# Altium PCB switch.PcbDoc
Units mil, origin at the board's own origin, x right, y up, seen from the top; angles counter-clockwise.
Board outline 850 x 435 mil, 2 copper layers (Top Layer, Bottom Layer); 25 components, 13 nets, 43 pads, 4 vias.
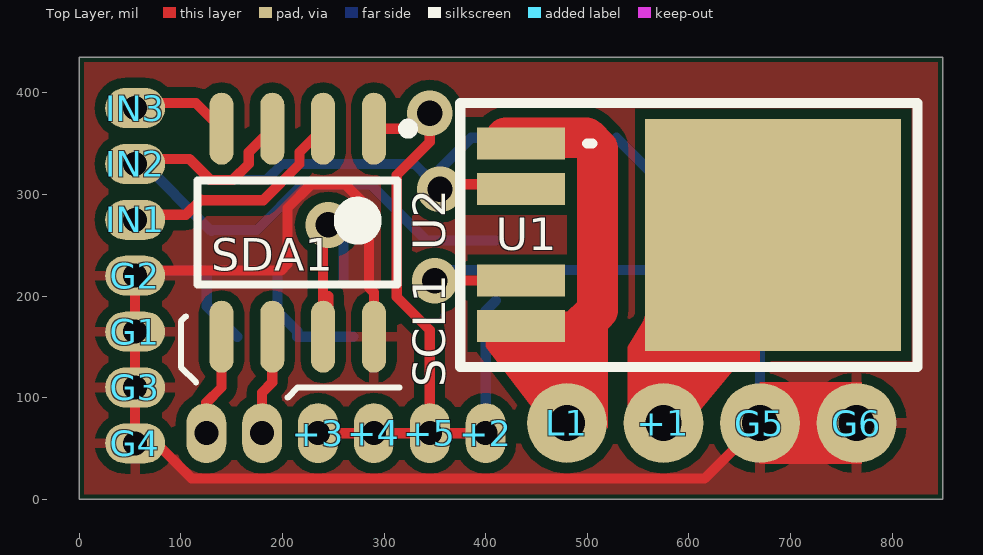
[diagram p0: Top Layer view]
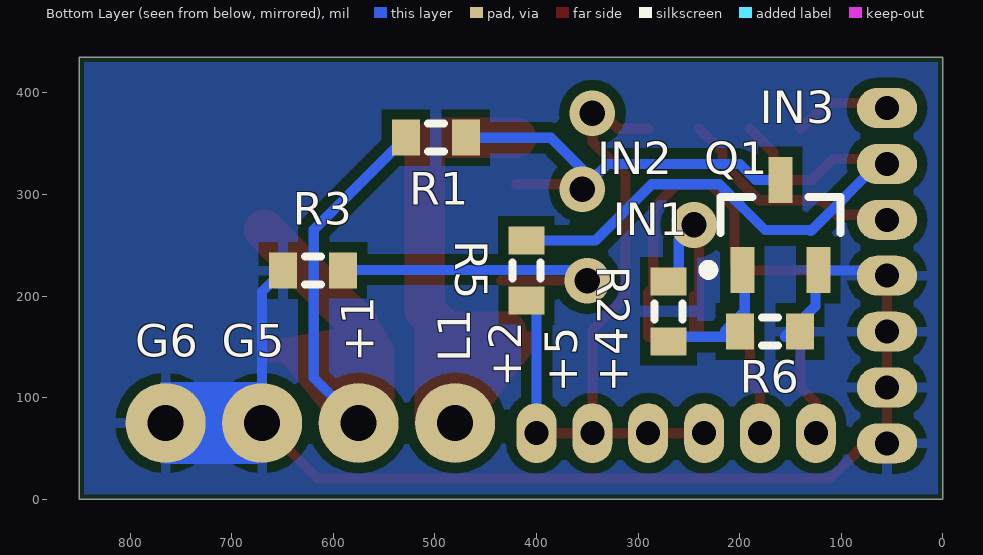
[diagram p1: Bottom Layer view, seen from below]

## Layer stack, top to bottom
Top Solder: solder mask 0.4, Solder Resist, Dk 3.5
Top Layer: signal copper 1.4
Dielectric1: dielectric 12.6, FR-4, Dk 4.8
Bottom Layer: signal copper 1.4
Bottom Solder: solder mask 0.4, Solder Resist, Dk 3.5

## Board outline
850,0 850,435 0,435 0,0

## Design rules (kind name [scope] priority, off if disabled: settings)
Clearance [All] p1: gap=10 ignorepadtopadclearanceinfootprint=FALSE except(0: Arc-Hole Track-Hole SMDPad-Hole THPad-Hole Via-Hole Fill-Hole Poly-Hole Region-Hole Text-Hole)
MinimumSolderMaskSliver [All] p1: minsoldermaskwidth=7
PolygonConnect [All] p1: connectstyle=Relief reliefconductorwidth=10 reliefentries=4 polygonreliefangle="90 Angle" airgapwidth=10
RoutingVias [All] p1: holewidth=28 width=50 viastyle="Through Hole" minholewidth=28 minwidth=50 maxholewidth=28 maxwidth=50
SilkToSilkClearance [All] p1: silktosilkclearance=5
SilkToSolderMaskClearance SilkToSolderMaskClearance_1 [HasFootprint('J1-0603')] p1: minsilkscreentomaskgap=0 clearancetoexposedcopper=TRUE
SilkToSolderMaskClearance [IsPad] p2: minsilkscreentomaskgap=7 clearancetoexposedcopper=TRUE
SolderMaskExpansion [All] p1: expansion=4
Width Width_1 [InNetClass('hc')] p1: maxlimit=100 minlimit=40 preferedwidth=40
Width [All] p2: maxlimit=40 minlimit=10 preferedwidth=10
27 further rules are at their usual default settings.

## Classes and differential pairs
net class hc: NetL1_1

## Components (designator, comment, footprint, x,y, rotation, side; value= is the part's Value field where it differs from the comment)
+1 "Socket" PIN1 575,75 r0 top
+2 "Socket" PIN1L 400,65 r0 top
+3 "Socket" PIN1L 235,65 r0 top
+4 "Socket" PIN1L 290,65 r0 top
+5 "Socket" PIN1L 345,65 r0 top
G1 "Socket" PIN1L 55,165 r90 top
G2 "Socket" PIN1L 55,220 r90 top
G3 "Socket" PIN1L 55,110 r90 top
G4 "Socket" PIN1L 55,55 r90 top
G5 "Socket" PIN1 670,75 r0 top
G6 "Socket" PIN1 765,75 r0 top
IN1 "Socket" PIN1L 55,275 r90 top
IN2 "Socket" PIN1L 55,330 r90 top
IN3 "Socket" PIN1L 55,385 r90 top
L1 "Socket" PIN1 480,75 r0 top
Q1 "BC847B" SOT-23_N 160,270 r90 bottom
R1 "22k" J1-0603 499.13,355.87 r180 bottom
R2 "1.2k" J1-0603 270,185 r270 bottom
R3 "1.2k" J1-0603 620,225 r0 bottom
R5 "4.7k" J1-0603 410,225 r270 bottom
R6 "10k" J1-0603 170,165 r180 bottom
SCL1 "Socket" PIN1L 180,65 r180 top
SDA1 "Socket" PIN1L 125,65 r180 top
U1 "BTS6143D" BTS6143D 435,350 r270 top
U2 "PIC12F1840" SOIC150-8_N 215,262.36 r270 top

## Footprints (in the part's own frame and the unit in brackets; to place one, negate y for a bottom-side part, rotate by r counter-clockwise, add the part's x,y. Pads: shape width x height; smd on the part's side, far side on the other; paste and mask are expansions set on the pad)
BTS6143D [mm]
  rect 0.8x2.2 smd mask+0.03: 1(0,0) 2(1.14,0) 4(3.42,0) 5(4.56,0)
  rect 5.8x6.4 smd: 3(2.28,6.3)
  silkscreen extent -1.02,-1.52 5.59,9.91
J1-0603 [mm] "Chip Resistor, Body 1.6x0.8mm, IPC High Density"
  rect 0.7x0.9 smd: 1(-0.75,0) 2(0.75,0)
  silkscreen extent -0.2,-0.35 0.2,0.35, body extent -0.85,-0.48 0.85,0.48, height 0.9
PIN1 [mm] "Connector; Plug"
  round 2 hole 0.9: 1(0,0)
PIN1L [mm] "Connector; Plug"
  oval 1x1.5 hole 0.6: 1(0,0)
SOIC150-8_N [mm] "8-Pin Plastic Narrow Body Small Outline Integrated Circuit 1.27 mm Pitch, IPC Medium Density"
  oval 1.8x0.6 smd: 1(-2.6,1.905) 2(-2.6,0.635) 3(-2.6,-0.635) 4(-2.6,-1.905) 5(2.6,-1.905) 6(2.6,-0.635) 7(2.6,0.635) 8(2.6,1.905)
  silkscreen extent -2.72,-2.5 1.3,2.88, body extent -2,-2.5 2,2.5, height 1.76
SOT-23_N [mm] "SOT23, 3-Leads, Body 2.9x1.3mm, Pitch 0.95mm, Lead Span 2.5mm, IPC Medium Density"
  rect 1.15x0.6 smd: 1(-1.125,0.95) 2(-1.125,-0.95) 3(1.125,0)
  silkscreen extent -1.25,-1.5 0.7,1.93, body extent -0.7,-1.5 0.7,1.5, height 1.1

## Part data
Q1: library part NPN, "NPN Bipolar Transistor"
R1 R2 R3 R5 R6: library part Res3, "Resistor"

## Via types
v1: diameter 45, hole 25, Top Layer to Bottom Layer, 4 vias

## Nets (pads, with @x,y where several pads share a name; then routed paths per layer and width w, separated by ;. In a path a pad name is that pad's centre, name@x,y a point inside that pad or via, vN(x,y) a via of type N, cw(c..) or ccw(c..) an arc to the next point about the centre after c; other vN are vias at no path point)
GND: G1.1 G2.1 G3.1 G4.1 G5.1 G6.1 Q1.2 R3.2 R6.2 U2.8 | length 1559.8
  Top Layer w10: G2.1 G1.1 G3.1 G4.1 G4.1@71.11,55 ; G2.1@55,225 198.43,225 205,231.57 205,286.57 228.43,310 261.57,310 285,286.57 285,208.43 290,203.43 U2.8 ; G4.1@71.11,60 110.63,20.47 615.47,20.47 G5.1
  Bottom Layer w10: G2.1@55,225 123.31,225 125.47,222.83 125.47,190 155.47,160 ; R3.2 670,204.53 G5.1
Net+1_1: +1.1 R1.1 U1.3 | length 470.1
  Top Layer w40: U1.3@575,172.2 U1.3@668.03,265.24
  Bottom Layer w10: R1.1 619.25,265.28 619.25,119.25 +1.1 +1.1@576.82,75
Net+2_1: +2.1 +3.1 +4.1 +5.1 R5.2 U2.1 | length 692.9
  Top Layer w10: +3.1 +4.1 +5.1 ; U2.1 319.72,364.72 v1@335,380 ; v1(345,380) 345,351.57 312.5,319.07 312.5,199.04 345,166.54 +5.1 ; +2.1 +5.1
  Bottom Layer w10: +2.1 400,185.47 R5.2
NetIN1_1: IN1.1 U2.2 | length 227.4
  Top Layer w10: IN1.1@55,280 104.9,280 119.9,295 120.61,294.29 181.11,294.29 216.81,330 216.81,341.54 U2.2
NetIN2_1: IN2.1 R5.1 U2.3 | length 598.4
  Top Layer w10: IN2.1@55,335 108.19,335 128.89,314.29 151.11,314.29 166.81,330 166.81,341.54 U2.3
  Bottom Layer w10: IN2.1 IN2.1@58.89,330 ; IN2.1@58.89,335 130,263.89 130,265 175,265 220,310 286.57,310 342.04,254.53 R5.1
NetIN3_1: IN3.1 U2.4 | length 95.5
  Top Layer w10: IN3.1@55,390 114.72,390 U2.4
NetL1_1: L1.1 U1.1 U1.5 | length 455.6
  Top Layer w40: U1.1@420,355.87 499.13,355.87 510,345 510,185.94 489.06,165 429.61,165 485,109.61 L1.1@485,75
NetQ1_1: Q1.1 R2.2 R6.1 | length 130.3
  Bottom Layer w10: Q1.1 195,223.31 195,185 214.53,165.47 214.53,160 R2.2@270,160
NetQ1_3: Q1.3 R1.2 U1.2 | length 433.4
  Top Layer w10: v1@340,310 419.88,310 U1.2@420,310.12
  Bottom Layer w10: Q1.3 184.29,314.29 200,330 330,330 v1@345,315 ; v1(355,305) v1@345,315 ; R1.2 385.87,355.87 v1@345,315
NetR2_1: R2.1 U2.7 | length 213.8
  Top Layer w10: v1@240,270 U2.7 245,165 245,200
  Bottom Layer w10: v1(245,270) 260,255 R2.1@260,214.53
NetR3_1: R3.1 U1.4 | length 325.1
  Top Layer w10: v1(350,215) 350.35,215.35 U1.4
  Bottom Layer w10: v1@350,225.75 R3.1@590,225.75
NetSCL1_1: SCL1.1 U2.6 | length 99.1
  Top Layer w10: SCL1.1 180,105 190,115 U2.6
NetSDA1_1: SDA1.1 U2.5 | length 101.2
  Top Layer w10: SDA1.1 125,95 140,110 U2.5

## Polygon pours and split planes (outlines as drawn)
GND on Top Layer "Top Layer-No Net" (solid, pour order 2): 845,430 845,5 5,5 5,430
GND on Bottom Layer "Top Layer-No Net" (solid, pour order 4): 845,430 845,5 5,5 5,430

## Other copper
Top Layer:
  region net GND: 670,35 770,35 770,115 670,115
  region net NetL1_1: 520,185 500,165 400,165 400,150 450,85 450,75 515,75 520,70
  region net Net+1_1: 540,80 540,150 555,175 670,155 670,135 650,135 605,80
Bottom Layer:
  region net GND: 675,35 765,35 770,40 770,115 670,115

## Silkscreen, mask and mechanical layers (free items; w line width, h text height)
Top Overlay:
  lines w6: 105,180 100,175 100,130 115,115 ; 205,100 215,110 315,110
Mechanical 1:
  the board outline again, w5